# EAGLE board faceHound_base_itsy_usb (EAGLE 9.6.2)
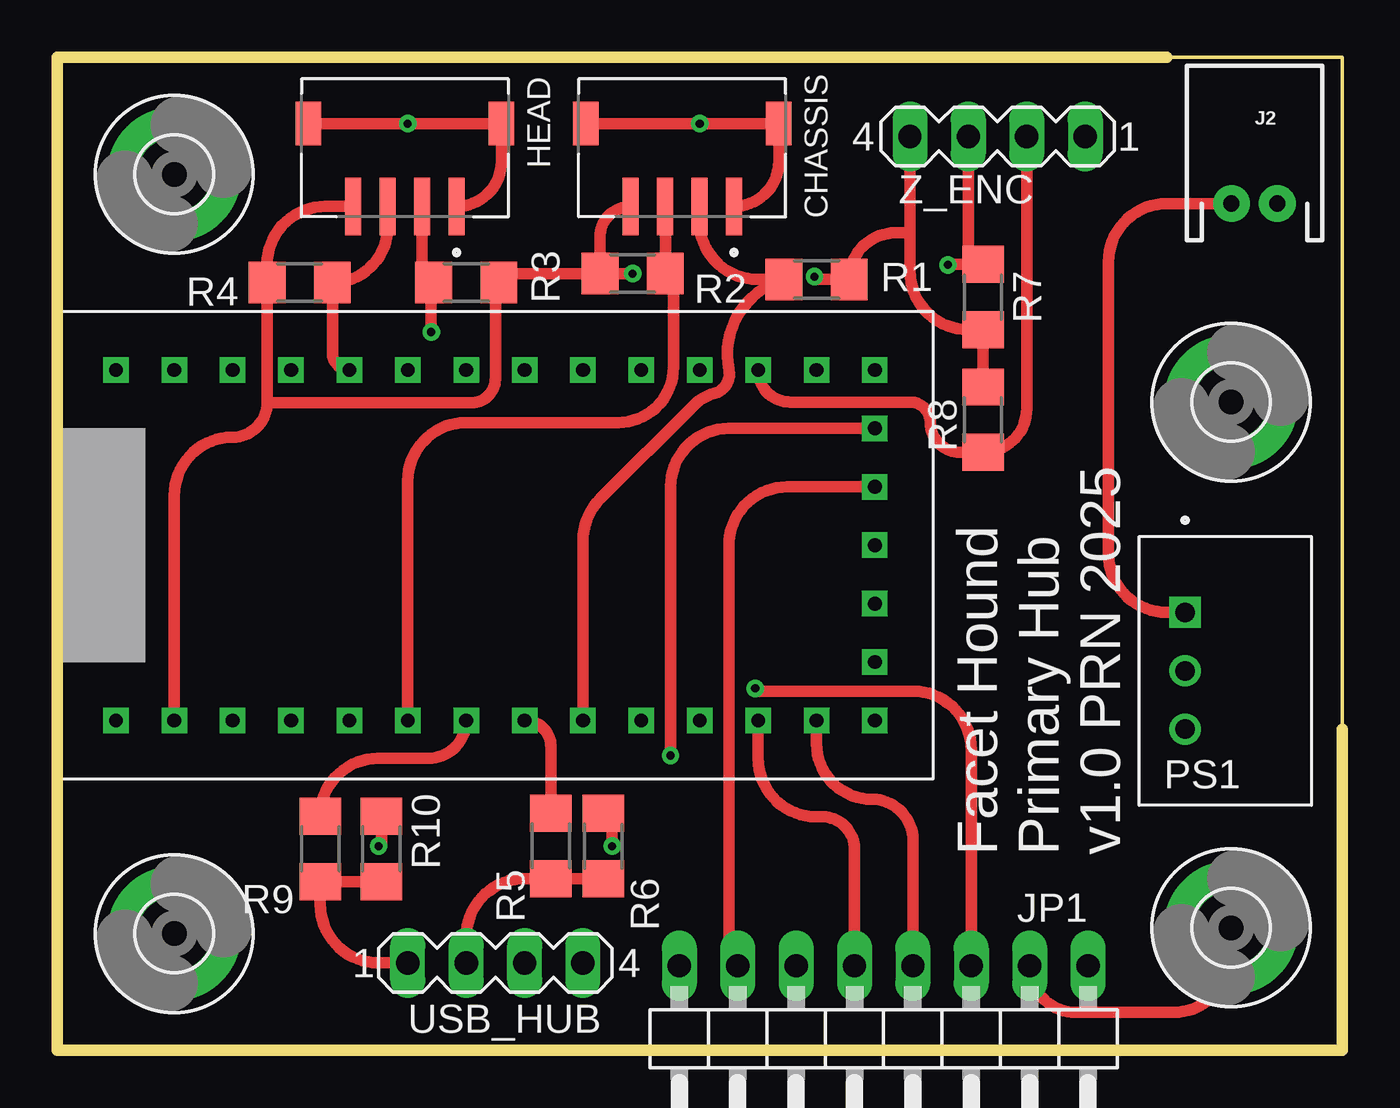
[diagram p0: board, top side]
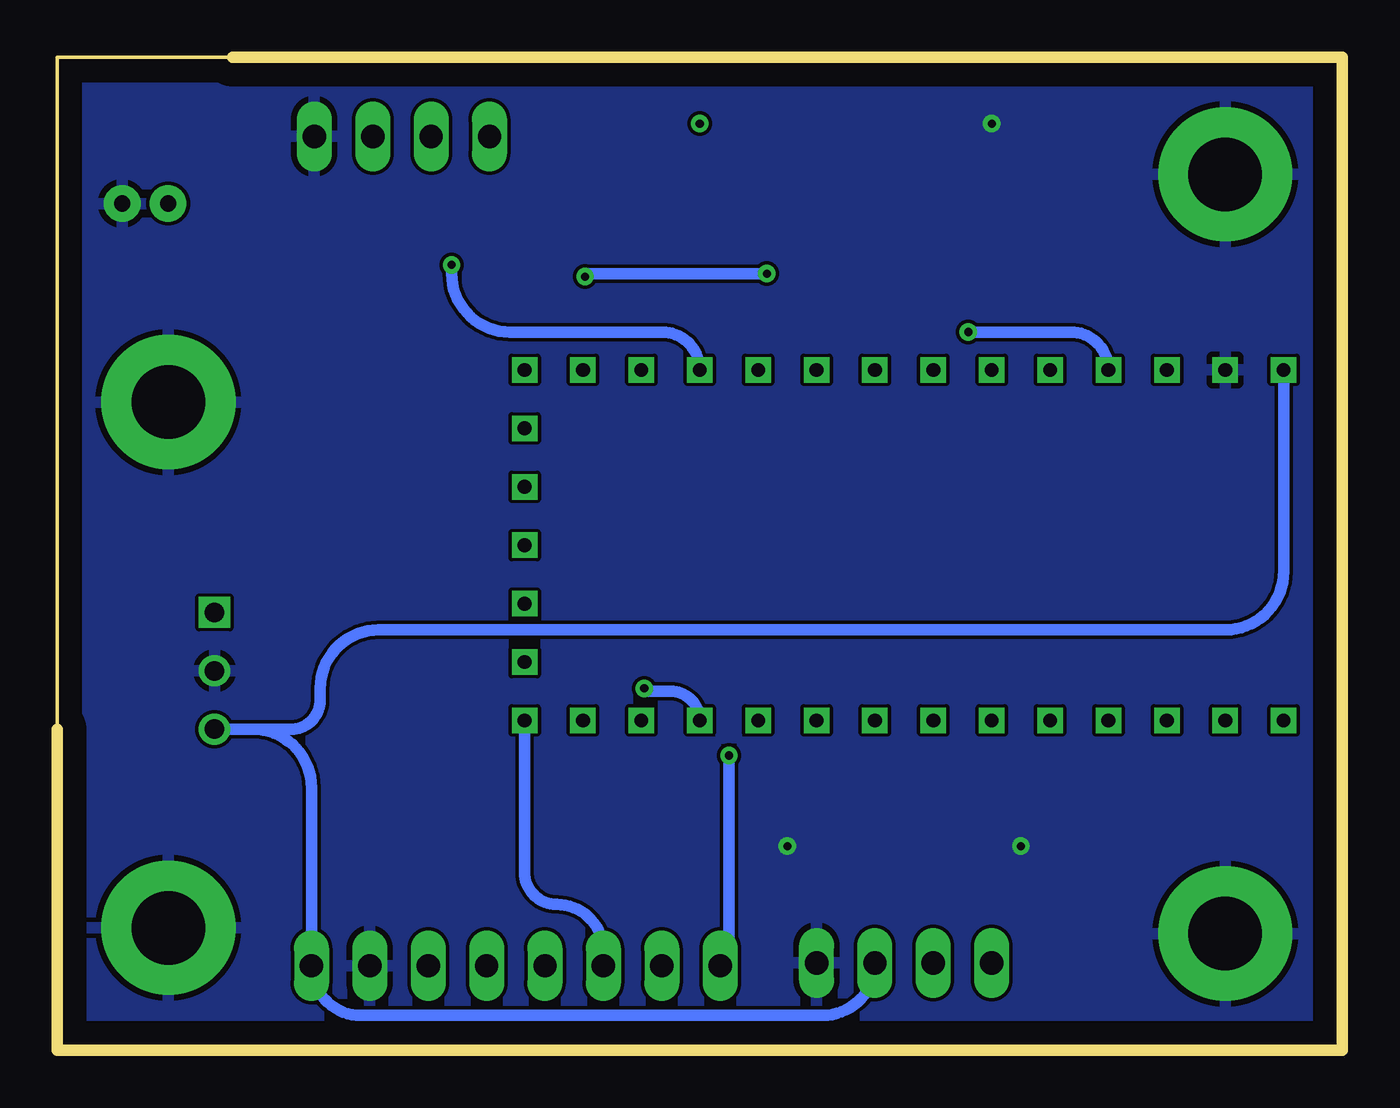
[diagram p1: board, bottom side, seen from below]

Size 55.88 x 43.18 mm. Coordinates in mm from the lower left corner, seen from the top.
Outline: 0,0 47.93,0
Outline: 0,0 55.88,0 55.88,13.97 55.88,43.18 46.99,43.18
Outline: 48.26,43.18 46.99,43.18
Outline: 46.99,43.18 0,43.18 0,0
Copper layers (1*16): Top 0.035mm / dielectric 1.5mm / Bottom 0.035mm
Design rules "default": minimum track width 6mil, minimum drill 0.35mm, track to track 6mil, track to pad 6mil, pad to pad 6mil, via to via 6mil, smd to smd 6mil, copper to edge 40mil, drill to drill 6mil, minimum pad ring 10mil, minimum via ring 8mil, stop-mask expansion 4mil, vias tented up to drill 0mil, thermal gap 10mil

## Footprints (pad centres in the part's own frame; a part is rotated, then mirrored left to right if it is on the bottom)
JST_S4B-ZR-SM4A-TF(LF)(SN) = smd 0.7 x 2.5: 1 -2.25,0; 2 -0.75,0; 3 0.75,0; 4 2.25,0 | smd 1.1 x 1.9: S1 -4.2,-3.6; S2 4.2,-3.6
3,2-PAD = drill 3.2 pad 5.842: B3,2 0,0
JST-2-PTH = drill 0.7 pad 1.6: 1 -1,0; 2 1,0
1X08/90 = drill 1.016 long: 1 -8.89,-3.81; 2 -6.35,-3.81; 3 -3.81,-3.81; 4 -1.27,-3.81; 5 1.27,-3.81; 6 3.81,-3.81; 7 6.35,-3.81; 8 8.89,-3.81
CONV_TSR_1-2450 = drill 0.85 square: 1 -2.54,-1.75 | drill 0.85: 2 0,-1.75; 3 2.54,-1.75
R1206 = smd 1.6 x 1.803: 1 -1.422,0; 2 1.422,0
ITSYBITSY_M4 = drill 0.6 square: P$1 -11.43,8.89; P$2 -11.43,6.35; P$3 -11.43,3.81; P$4 -11.43,1.27; P$5 -11.43,-1.27; P$6 -11.43,-3.81; P$7 -11.43,-6.35; P$8 -11.43,-8.89; P$9 -11.43,-11.43; P$10 -11.43,-13.97; P$11 -11.43,-16.51; P$12 -11.43,-19.05; P$13 -11.43,-21.59; P$14 -11.43,-24.13; P$15 -8.89,-24.13; P$16 -6.35,-24.13; P$17 -3.81,-24.13; P$18 -1.27,-24.13; P$19 1.27,-24.13; P$20 3.81,-24.13; P$21 3.81,-21.59; P$22 3.81,-19.05; P$23 3.81,-16.51; P$24 3.81,-13.97; P$25 3.81,-11.43; P$26 3.81,-8.89; P$27 3.81,-6.35; P$28 3.81,-3.81; P$29 3.81,-1.27; P$30 3.81,1.27; P$31 3.81,3.81; P$32 3.81,6.35; P$33 3.81,8.89
MA04-1 = drill 1.016 long: 1 -3.81,0; 2 -1.27,0; 3 1.27,0; 4 3.81,0

## Placement (x,y rotation side)
CHASSIS  S4B-ZR-SM4A-TF(LF)(SN)  [JST_S4B-ZR-SM4A-TF(LF)(SN)]  27.18,36.7 180 top
H1  MOUNT-PAD-ROUND3.2  [3,2-PAD]  51.05,5.33 0 top
H2  MOUNT-PAD-ROUND3.2  [3,2-PAD]  51.05,28.19 0 top
H3  MOUNT-PAD-ROUND3.2  [3,2-PAD]  5.08,5.08 0 top
H4  MOUNT-PAD-ROUND3.2  [3,2-PAD]  5.08,38.1 0 top
HEAD  S4B-ZR-SM4A-TF(LF)(SN)  [JST_S4B-ZR-SM4A-TF(LF)(SN)]  15.11,36.7 180 top
J2  [JST-2-PTH]  52.07,36.83 0 top
JP1  [1X08/90]  35.94,-0.13 180 top
PS1  TSR_1-2450  [CONV_TSR_1-2450]  50.8,16.51 270 top
R1  [R1206]  33.02,33.53 180 top
R2  [R1206]  25.02,33.78 0 top
R3  [R1206]  17.78,33.4 180 top
R4  [R1206]  10.54,33.4 0 top
R5  4k7  [R1206]  21.46,8.89 270 top
R6  10k  [R1206]  23.75,8.89 90 top
R7  [R1206]  40.26,32.77 90 top
R8  [R1206]  40.26,27.43 90 top
R9  4k7  [R1206]  11.43,8.76 270 top
R10  10k  [R1206]  14.1,8.76 270 top
U$1  ITSYBITSY_M4  [ITSYBITSY_M4]  11.43,25.78 90 top
USB_HUB  [MA04-1]  19.05,3.81 0 top
Z_ENC  [MA04-1]  40.89,39.75 180 top

## Library data of the parts
CHASSIS HEAD = S4B-ZR-SM4A-TF_LF__SN_; AVAILABILITY: In Stock; CHECK_PRICES: https://www.snapeda.com/parts/S4B-ZR-SM4A-TF(LF)(SN)/JST/view-part/?ref=eda; DESCRIPTION: Connector Header Surface Mount, Right Angle 4 position 0.059 (1.50mm); MF: JST Sales; MP: S4B-ZR-SM4A-TF(LF)(SN); PACKAGE: None; PRICE: None; SNAPEDA_LINK: https://www.snapeda.com/parts/S4B-ZR-SM4A-TF(LF)(SN)/JST/view-part/?ref=snap
H1-H4 = holes
J2 = SparkFun-Connectors; PROD_ID: CONN-09863; SKU: PRT-09914
JP1 = pinhead
PS1 = TSR_1-2450; MANUFACTURER: Traco Power; MAXIMUM_PACKAGE_HEIGHT: 10.6mm; PARTREV: Apr 27, 2020; STANDARD: Manufacturer Recommendations
R1-R10 = adafruit
U$1 = itsyBitsy
USB_HUB Z_ENC = con-lstb; OC_FARNELL: unknown; OC_NEWARK: unknown

## Nets
GND: H1.B3,2 H2.B3,2 H3.B3,2 H4.B3,2 HEAD.1 HEAD.S1 HEAD.S2 J2.2 JP1.2 PS1.2 R6.2 R10.1 U$1.P$32 USB_HUB.4 Z_ENC.1
N$1: JP1.3 U$1.P$11
N$2: R9.2 R10.2 USB_HUB.1
N$4: R5.2 R6.1 USB_HUB.2
N$6: JP1.1 PS1.3 U$1.P$33 USB_HUB.3
N$7: CHASSIS.1 CHASSIS.S1 CHASSIS.S2
N$8: JP1.5 U$1.P$12
N$9: JP1.4 U$1.P$13
N$10: CHASSIS.4 HEAD.4 R1.1 R2.1 R3.1 R4.1 R7.1 R8.2 U$1.P$2 Z_ENC.4
N$11: JP1.6 U$1.P$14
N$12: JP1.8 U$1.P$19
N$13: JP1.7 U$1.P$18
N$14: CHASSIS.2 R1.2 U$1.P$9
N$15: CHASSIS.3 R2.2 U$1.P$6
N$16: HEAD.2 R3.2 U$1.P$30
N$17: HEAD.3 R4.2 U$1.P$29
N$18: R9.1 U$1.P$7
N$19: R5.1 U$1.P$8
N$20: R8.1 U$1.P$22 Z_ENC.2
N$21: R7.2 U$1.P$23 Z_ENC.3
N$22: J2.1 PS1.1

## Tracks (layer width: path | path; a pad name or v marks a point on that pad's centre or on a via)
GND  (via drill 0.35)
  Top 0.508: HEAD.S2 v15.24,40.3 HEAD.S1 19.31,38.65 arc-90 HEAD.1 | R10.1 14.1,9.02 arc-90 v13.97,8.89 | R6.2 arc-90 24.13,9.93 v24.13,8.89 | JP1.2 arc90 44.32,1.65 48.51,1.65 arc90 51.05,4.19 H1.B3,2
  pour Bottom: 2.54,43.18 arc90 0,40.64 0,1.27 arc90 1.27,0 3.81,0 53.34,0 arc90 55.88,2.54 55.88,41.91 arc90 54.61,43.18 44.45,43.18
N$1  (via drill 0.35)
  Top 0.508: JP1.3 39.75,13.08 arc90 37.21,15.62 30.48,15.62 arc-90 v30.35,15.75
  Bottom 0.508: U$1.P$11 arc-90 29.21,15.62 30.23,15.62 arc90 v30.35,15.75
N$2
  Top 0.508: USB_HUB.1 13.97,3.81 arc-90 11.43,6.35 R9.2 R10.2
N$4
  Top 0.508: USB_HUB.2 17.78,4.93 arc-90 20.32,7.47 R5.2 R6.1
N$6
  Bottom 0.508: U$1.P$33 2.54,20.83 arc90 5.08,18.29 41.91,18.29 arc-90 44.45,15.75 44.45,15.24 arc90 45.72,13.97 PS1.3 47.37,13.97 arc90 44.83,11.43 JP1.1 | 44.83,3.17 JP1.1 | USB_HUB.3 arc90 22.61,1.52 42.67,1.52 arc90 JP1.1
N$7  (via drill 0.35)
  Top 0.508: CHASSIS.S2 v27.94,40.3 CHASSIS.S1 31.38,38.65 arc-90 CHASSIS.1 29.34,36.7
N$8
  Top 0.508: U$1.P$12 30.48,12.7 arc90 33.02,10.16 33.27,10.16 arc-90 34.67,8.76 JP1.5
N$9
  Top 0.508: U$1.P$13 33.02,13.33 arc90 35.43,10.92 arc-90 37.21,9.14 JP1.4
N$10  (via drill 0.35)
  Top 0.508: R1.1 34.54,33.53 | 37.08,35.56 Z_ENC.4 | 37.08,35.56 37.08,33.88 arc90 39.62,31.34 R7.1 R8.2 | CHASSIS.4 arc90 23.6,35.37 R2.1 | HEAD.4 11.66,36.7 arc90 9.12,34.16 R4.1 9.12,28.17 | R3.1 arc-90 19.58,33.78 | 19.58,33.78 R2.1 | U$1.P$2 5.08,24.13 arc-90 7.62,26.67 arc90 9.12,28.17 | R1.1 arc-90 36.47,35.56 37.08,35.56 | 9.12,28.17 18.01,28.17 arc90 19.05,29.21 19.05,33.25 arc-90 19.58,33.78 | R2.1 v25.02,33.78 | v32.93,33.66 arc90 33.06,33.53 R1.1
  Bottom 0.508: v25.02,33.78 32.8,33.78 arc-90 v32.93,33.66
N$11
  Bottom 0.508: U$1.P$14 35.56,7.75 arc-90 34.16,6.35 arc90 32.13,4.32 JP1.6
N$12  (via drill 0.35)
  Top 0.508: U$1.P$19 29.21,27.05 arc90 26.67,24.51 v26.67,12.83
  Bottom 0.508: v26.67,12.83 26.67,4.06 arc90 JP1.8
N$13
  Top 0.508: U$1.P$18 31.75,24.51 arc90 29.21,21.97 29.21,4.06 arc90 JP1.7
N$14
  Top 0.508: CHASSIS.2 27.93,36.07 arc90 30.47,33.53 R1.2 arc85 29.21,29.59 arc-87 28.57,28.57 arc31 27.69,28.07 23.6,23.98 arc45 22.86,22.19 U$1.P$9
N$15
  Top 0.508: CHASSIS.3 arc-90 CHASSIS.3 R2.2 arc-90 26.8,33.43 26.8,29.72 arc-90 24.38,27.3 17.78,27.3 arc90 15.24,24.77 U$1.P$6
N$16  (via drill 0.35)
  Top 0.508: HEAD.2 15.86,33.67 arc90 16.51,33.02 16.51,33.25 arc90 R3.2 arc90 16.26,33.3 v16.26,31.24
  Bottom 0.508: U$1.P$30 arc-90 11.81,31.24 v16.26,31.24
N$17
  Top 0.508: HEAD.3 14.36,35.8 arc-90 R4.2 11.96,30.33 arc90 U$1.P$29
N$18
  Top 0.508: U$1.P$7 arc-90 16.13,12.7 13.95,12.7 arc90 R9.1
N$19
  Top 0.508: R5.1 21.46,13.21 arc90 U$1.P$8
N$20
  Top 0.508: Z_ENC.2 42.16,27.91 arc-90 R8.1 39.27,26.01 arc-90 37.97,27.3 arc90 37.08,28.19 31.88,28.19 arc-90 U$1.P$22
N$21  (via drill 0.35)
  Top 0.508: Z_ENC.3 39.62,34.82 arc90 R7.2 38.76,34.19 arc90 v38.74,34.16
  Bottom 0.508: U$1.P$23 arc-90 29.59,31.24 36.2,31.24 arc90 38.74,33.78 v38.74,34.16
N$22
  Top 0.508: J2.1 48.26,36.83 arc90 45.72,34.29 45.72,21.59 arc90 48.26,19.05 PS1.1

## Text on the board
tNames: Facet Hound / Primary Hub / v1.0 PRN 2025